# EAGLE board Pressure reg teat board (EAGLE 7.2.0)
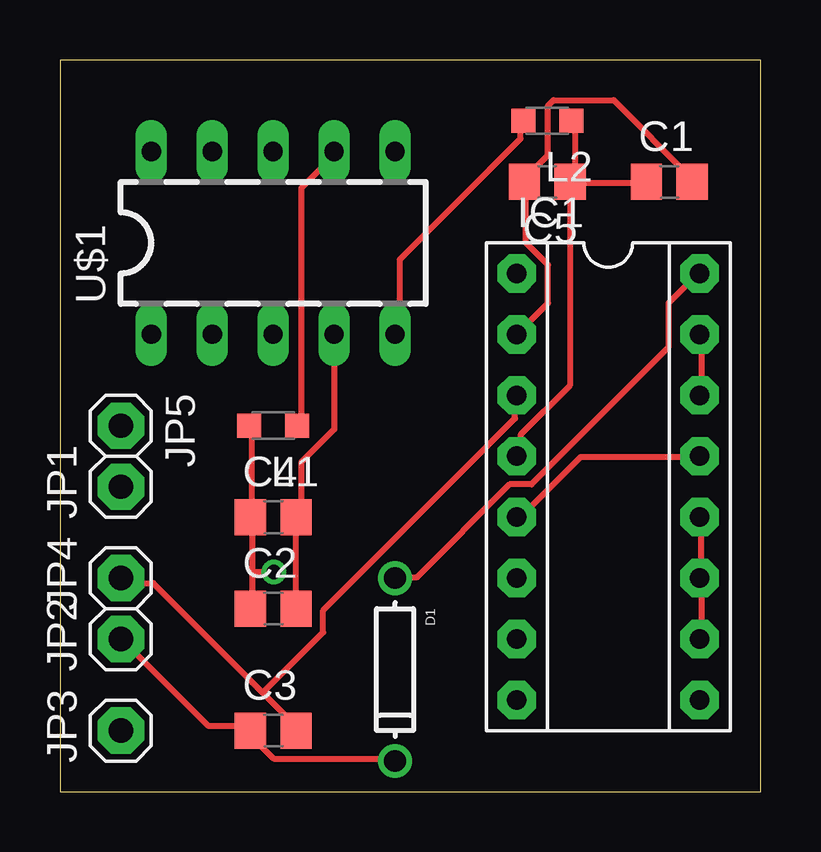
[diagram p0: board, top side]
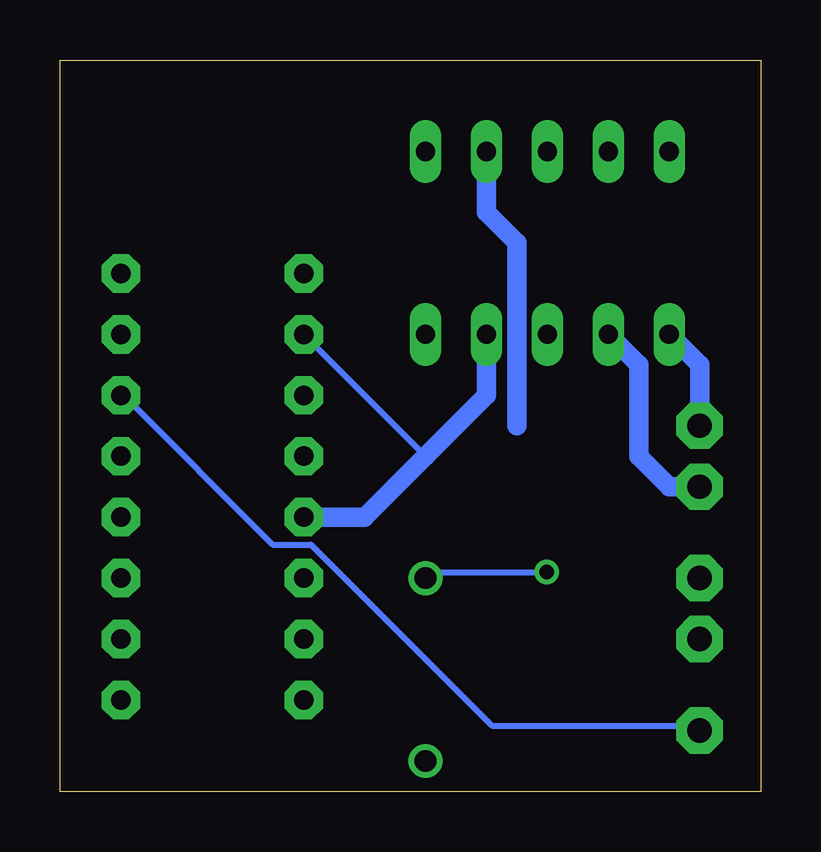
[diagram p1: board, bottom side, seen from below]

Size 29.21 x 30.48 mm. Coordinates in mm from the lower left corner, seen from the top.
Outline: 0,0 29.21,0 29.21,30.48 0,30.48 0,0
Copper layers (1*16): Top 0.035mm / dielectric 1.5mm / Bottom 0.035mm
Design rules "default": minimum track width 10mil, minimum drill 24mil, track to track 8mil, track to pad 8mil, pad to pad 8mil, via to via 8mil, smd to smd 8mil, copper to edge 40mil, drill to drill 8mil, minimum pad ring 10mil, minimum via ring 8mil, stop-mask expansion 4mil, vias tented up to drill 0mil, thermal gap 10mil

## Footprints (pad centres in the part's own frame; a part is rotated, then mirrored left to right if it is on the bottom)
C0805 = smd 1.3 x 1.5: 1 -0.95,0; 2 0.95,0
DO-1N4148 = drill 0.9: A -3.81,0; C 3.81,0
DIL16 = drill 0.813 pad 1.6 octagon: 1 -8.89,-3.81; 2 -6.35,-3.81; 3 -3.81,-3.81; 4 -1.27,-3.81; 5 1.27,-3.81; 6 3.81,-3.81; 7 6.35,-3.81; 8 8.89,-3.81; 9 8.89,3.81; 10 6.35,3.81; 11 3.81,3.81; 12 1.27,3.81; 13 -1.27,3.81; 14 -3.81,3.81; 15 -6.35,3.81; 16 -8.89,3.81
1X01 = drill 1.016 pad 1.93 octagon: 1 0,0
L2012C = smd 1 x 1: 1 -1,0; 2 1,0
NTA1215MC-DC_CONVERTER-SMT = drill 0.8 long: 1 -3.81,5.08; 2 -3.81,2.54; 3 -3.81,0; 4 -3.81,-2.54; 5 -3.81,-5.08; 6 3.81,-5.08; 7 3.81,-2.54; 8 3.81,0; 9 3.81,2.54; 10 3.81,5.08

## Placement (x,y rotation side)
C1  .22uF  [C0805]  25.4,25.4 0 top
C2  .22uF  [C0805]  8.89,7.62 0 top
C3  .01uF  [C0805]  8.89,2.54 0 top
C4  1uF  [C0805]  8.89,11.43 0 top
C5  1uF  [C0805]  20.32,25.4 180 top
D1  [DO-1N4148]  13.97,5.08 270 top
IC1  RCV420P  [DIL16]  22.86,12.7 270 top
JP1  Vin+  [1X01]  2.54,12.7 90 top
JP2  PSV+  [1X01]  2.54,6.35 90 top
JP3  Vout  [1X01]  2.54,2.54 90 top
JP4  PSIo  [1X01]  2.54,8.89 90 top
JP5  Vin-  [1X01]  2.54,15.24 270 top
L1  220uH  [L2012C]  8.89,15.24 180 top
L2  220uH  [L2012C]  20.32,27.94 180 top
U$1  NTA1215MC-DC_CONVERTER-SMT  [NTA1215MC-DC_CONVERTER-SMT]  8.89,22.86 90 top

## Library data of the parts
C1-C5 L1 L2 = rcl
D1 JP1-JP5 = adafruit
IC1 = burr-brown; MF: TEXAS INSTRUMENTS; MPN: RCV420JP; OC_FARNELL: 1212342; OC_NEWARK: 60K6765
U$1 = ic-NTA1215MC-DC_Converter

## Nets
GND: C1.2 C2.2 C4.2 C5.2 IC1.2 IC1.5 IC1.13 U$1.4
N$1: IC1.10 IC1.11 IC1.12
N$2: C1.1 C5.1 IC1.4 L2.1
N$3: IC1.14 IC1.15 JP3.1
N$4: C2.1 C4.1 D1.A IC1.16 L1.2
N$5: C3.2 IC1.3 JP4.1
N$6: L2.2 U$1.5
N$7: L1.1 U$1.7
N$8: JP5.1 U$1.1
N$9: JP1.1 U$1.2
PSV+: C3.1 D1.C JP2.1

## Tracks (layer width: path | path; a pad name or v marks a point on that pad's centre or on a via)
GND
  Top 0.254: IC1.2 20.34,20.34 20.34,21.95 19.43,22.86 19.43,25.38 C5.2 19.43,25.6 20.34,26.52 20.34,28.57 20.57,28.8 23.09,28.8 26.29,25.6 C1.2 | C2.2 9.83,7.77 C4.2 10.06,11.43 10.06,13.72 11.43,15.09 U$1.4 | IC1.13 26.52,13.95 21.72,13.95 19.2,11.43 IC1.5
  Bottom 0.254: 13.97,13.97 IC1.2
  Bottom 0.813: U$1.4 11.43,16.51 13.97,13.97 16.51,11.43 IC1.5
N$1
  Top 0.254: IC1.10 26.75,6.4 26.75,8.69 IC1.11 26.75,8.91 26.75,11.43 IC1.12
N$2
  Top 0.254: L2.1 21.49,27.89 21.49,25.6 C5.1 | C1.1 24.23,25.38 21.49,25.38 C5.1 | IC1.4 19.2,14.17 19.2,14.86 21.26,16.92 21.26,25.38 C5.1
N$3
  Top 0.254: IC1.14 26.75,16.69 26.75,18.97 IC1.15
  Bottom 0.254: JP3.1 2.74,2.74 11.2,2.74 18.75,10.29 20.34,10.29 26.52,16.46 IC1.14
N$4  (via drill 0.61)
  Top 0.254: 8,11.43 8,15.09 L1.2 | 8,11.43 8,9.14 | 8,9.14 8,7.77 C2.1 | 8,11.43 C4.1 | D1.A 14.17,8.91 14.86,8.91 18.75,12.8 19.66,12.8 25.38,18.52 25.38,20.34 26.52,21.49 IC1.16 | v8.91,9.14 8,9.14
  Bottom 0.254: v8.91,9.14 13.72,9.14 D1.A
N$5
  Top 0.254: 8.46,4.12 3.89,8.69 2.74,8.69 JP4.1 | 8.46,4.12 9.83,2.74 C3.2 | 8.46,4.12 10.97,6.63 10.97,7.54 18.97,15.54 18.97,16.46 IC1.3
N$6
  Top 0.254: L2.2 19.2,27.89 19.2,27.2 14.17,22.17 14.17,19.2 U$1.5
N$7
  Top 0.254: L1.1 10.06,15.32 10.06,25.15 11.43,26.52 U$1.7
  Bottom 0.813: U$1.7 11.43,24.13 10.16,22.86 10.16,15.24
N$8
  Bottom 0.813: JP5.1 2.54,17.78 U$1.1
N$9
  Bottom 0.813: JP1.1 3.81,12.7 5.08,13.97 5.08,17.78 U$1.2
PSV+
  Top 0.254: JP2.1 2.74,6.17 6.17,2.74 7.77,2.74 C3.1 7.77,2.52 8.91,1.37 13.95,1.37 D1.C